# EAGLE board digispark_shield_led_matrix (EAGLE 6.2)
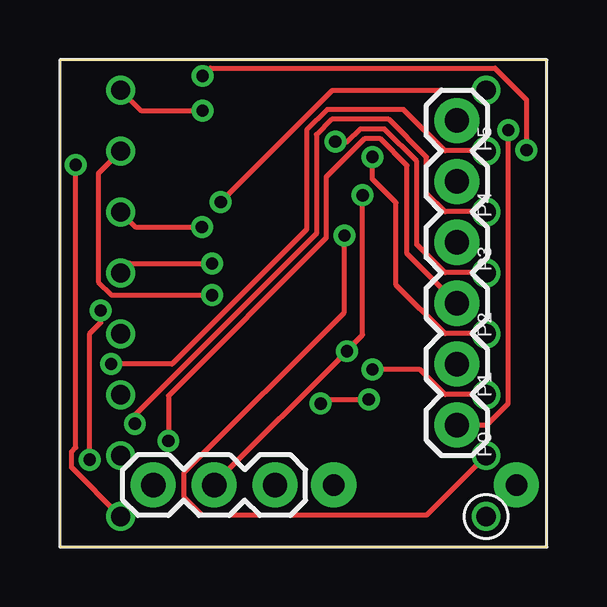
[diagram p0: board, top side]
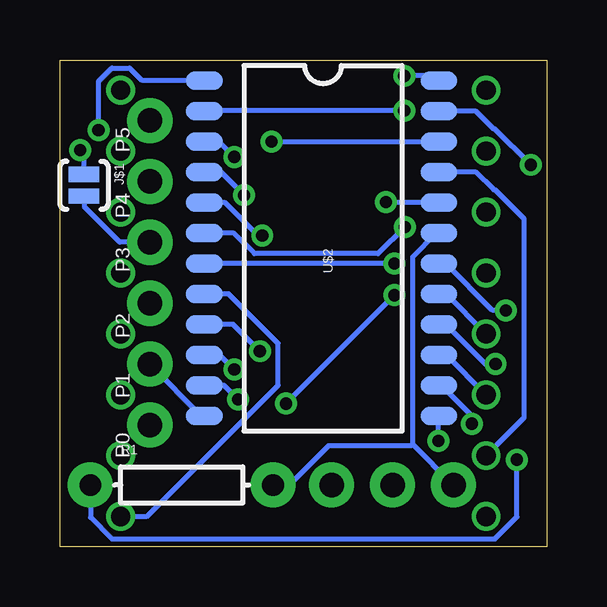
[diagram p1: board, bottom side, seen from below]

Size 20.3 x 20.3 mm. Coordinates in mm from the lower left corner, seen from the top.
Outline: 0,20.3 0,0 20.3,0 20.3,20.3 0,20.3
Copper layers (1*16): Top 0.035mm / dielectric 1.5mm / Bottom 0.035mm
Design rules: minimum track width 8mil, minimum drill 20mil, track to track 8mil, track to pad 8mil, pad to pad 8mil, via to via 8mil, smd to smd 8mil, copper to edge 8mil, drill to drill 8mil, minimum pad ring 8mil, minimum via ring 8mil, stop-mask expansion 4mil, vias tented up to drill 25mil, thermal gap 10mil

## Footprints (pad centres in the part's own frame; a part is rotated, then mirrored left to right if it is on the bottom)
SJ_2S-NO = smd 0.635 x 1.27: 1 -0.45,0; 2 0.45,0
1X03 = drill 1.016 pad 1.88: 1 0,0; 2 2.54,0; 3 5.08,0
1X06 = drill 1.016 pad 1.88: 1 0,0; 2 2.54,0; 3 5.08,0; 4 7.62,0; 5 10.16,0; 6 12.7,0
AXIAL-0.3 = drill 0.9 pad 1.88: P$1 -3.81,0; P$2 3.81,0
LED_8X8_2MM_BL-M07C881 = drill 0.8: +1 1.27,-7.62; +2 3.81,-7.62; +3 6.35,-7.62; +4 8.89,-7.62; +5 -8.89,7.62; +6 -6.35,7.62; +7 -3.81,7.62; +8 -1.27,7.62; -1 -8.89,-7.62; -2 -6.35,-7.62; -3 -3.81,-7.62; -4 -1.27,-7.62; -5 1.27,7.62; -6 3.81,7.62; -7 6.35,7.62; -8 8.89,7.62
SO-24W = smd 0.762 x 1.524: 1 -6.985,-4.953; 2 -5.715,-4.953; 3 -4.445,-4.953; 4 -3.175,-4.953; 5 -1.905,-4.953; 6 -0.635,-4.953; 7 0.635,-4.953; 8 1.905,-4.953; 9 3.175,-4.953; 10 4.445,-4.953; 11 5.715,-4.953; 12 6.985,-4.953; 13 6.985,4.826; 14 5.715,4.826; 15 4.445,4.826; 16 3.175,4.826; 17 1.905,4.826; 18 0.635,4.826; 19 -0.635,4.826; 20 -1.905,4.826; 21 -3.175,4.826; 22 -4.445,4.826; 23 -5.715,4.826; 24 -6.985,4.826

## Placement (x,y rotation side)
J$1  DO  [SJ_2S-NO]  19.3,15.07 270 bottom
JP2  [1X03]  8.97,2.58 180 top
JP3  [1X06]  16.55,5.08 90 top
R1  [AXIAL-0.3]  15.22,2.58 0 bottom
U$1  LED_ARRAY_8X8  [LED_8X8_2MM_BL-M07C881]  10.15,10.15 90 top
U$2  MAX7219  [SO-24W]  9.32,12.45 270 bottom

## Library data of the parts
J$1 JP2 JP3 R1 U$2 = SparkFun
U$1 = sparr

## Nets
GND: JP2.2 U$2.4 U$2.9
N$1: R1.P$1 U$2.18
N$2: JP3.1 U$2.1
N$3: JP3.2 U$2.12
N$4: JP3.3 U$2.13
N$5: U$1.-8 U$2.2
N$6: U$1.-7 U$2.11
N$7: U$1.-6 U$2.6
N$8: U$1.-5 U$2.7
N$9: U$1.-4 U$2.3
N$10: U$1.-3 U$2.10
N$11: U$1.-2 U$2.5
N$12: U$1.-1 U$2.8
N$13: U$1.+8 U$2.17
N$14: U$1.+7 U$2.15
N$15: U$1.+6 U$2.21
N$16: U$1.+5 U$2.23
N$17: U$1.+4 U$2.20
N$18: U$1.+3 U$2.16
N$19: U$1.+2 U$2.14
N$20: U$1.+1 U$2.22
N$21: J$1.1 U$2.24
N$22: J$1.2 JP3.4
VCC: JP2.3 R1.P$2 U$2.19

## Tracks (layer width: path | path; a pad name or v marks a point on that pad's centre or on a via)
GND  (via drill 0.51)
  Top 0.203: JP2.2 6.45,2.59 6.45,2.64 v11.96,8.15 12.01,8.23 12.62,8.84 v12.62,14.66
  Bottom 0.203: v11.96,8.15 13.08,9.27 U$2.9 | v12.62,14.66 13.59,15.62 U$2.4
N$1  (via drill 0.51)
  Top 0.203: v1.7,9.86 1.7,9.35 1.25,8.89 v1.25,3.63
  Bottom 0.203: v1.7,9.86 2.26,9.86 4.22,11.81 U$2.18 | v1.25,3.63 1.25,1.25 2.16,0.33 18.14,0.33 19.02,1.22 19.02,2.56 R1.P$1
N$2  (via drill 0.51)
  Top 0.203: v18.69,17.37 18.69,5.97 17.8,5.08 JP3.1
  Bottom 0.203: v18.69,17.37 18.69,19.41 18.14,19.96 17.4,19.96 16.89,19.46 14.3,19.46 U$2.1
N$3
  Bottom 0.203: U$2.12 14.3,5.49 14.43,5.49 16.54,7.59 JP3.2
N$4  (via drill 0.51)
  Top 0.203: v4.52,4.42 4.52,6.3 11.1,12.88 11.1,15.42 12.7,17.02 13.36,17.02 14.48,15.9 14.48,12.22 16.54,10.16 JP3.3
  Bottom 0.203: v4.52,4.42 4.52,5.46 U$2.13
N$5  (via drill 0.51)
  Top 0.203: v5.94,18.19 3.38,18.19 2.54,19.02 U$1.-8
  Bottom 0.203: v5.94,18.19 14.28,18.19 U$2.2
N$6  (via drill 0.51)
  Top 0.203: v12.88,6.15 11.05,6.15 v10.87,5.97 | v6.35,10.49 2.16,10.49 1.6,11.05 1.6,15.57 U$1.-7
  Bottom 0.203: v12.88,6.15 13.46,6.73 U$2.11 | v6.35,10.49 v10.87,5.97
N$7  (via drill 0.51)
  Top 0.203: v5.92,13.34 3.15,13.34 2.54,13.95 U$1.-6
  Bottom 0.203: v5.92,13.34 7.04,12.22 12.19,12.22 13.06,13.08 U$2.6
N$8  (via drill 0.51)
  Top 0.203: v6.35,11.81 2.92,11.81 U$1.-5
  Bottom 0.203: v6.35,11.81 U$2.7
N$9  (via drill 0.51)
  Top 0.203: v13.03,16.26 13.03,15.34 14.02,14.35 14.02,10.92 16.05,8.89 17.75,8.89 U$1.-4
  Bottom 0.203: v13.03,16.26 13.66,16.89 U$2.3
N$10  (via drill 0.51)
  Top 0.203: v13.03,7.39 15.01,7.39 16.05,6.35 17.75,6.35 U$1.-3
  Bottom 0.203: v13.03,7.39 13.64,8 U$2.10
N$11  (via drill 0.51)
  Top 0.203: v11.86,12.98 11.86,9.78 5.18,3.1 5.18,2.06 5.92,1.32 15.29,1.32 U$1.-2
  Bottom 0.203: v11.86,12.98 12.04,12.98 13.41,14.35 U$2.5
N$12
  Bottom 0.203: U$2.8 13.26,10.54 11.2,8.48 11.2,6.73 16.66,1.27 17.75,1.27 U$1.-1
N$13
  Bottom 0.203: U$1.+8 4.19,10.54 U$2.17
N$14
  Bottom 0.203: U$1.+7 4.19,8 U$2.15
N$15
  Bottom 0.203: U$2.21 2.95,15.62 2.21,14.88 2.16,14.88 0.94,13.66 0.94,5.38 2.52,3.81 U$1.+6
N$16  (via drill 0.51)
  Top 0.203: v0.66,15.93 0.66,4.14 0.48,3.96 0.48,3.3 2.52,1.27 U$1.+5
  Bottom 0.203: v0.66,15.93 2.16,17.42 2.21,17.42 2.95,18.16 U$2.23
N$17  (via drill 0.51)
  Top 0.203: v6.71,14.38 11.35,19.02 17.75,19.02 U$1.+4
  Bottom 0.203: v6.71,14.38 4.52,14.38 U$2.20
N$18  (via drill 0.51)
  Top 0.203: v2.13,7.62 4.67,7.62 10.29,13.23 10.29,17.37 11.15,18.24 14.33,18.24 16.05,16.51 17.75,16.51 U$1.+3
  Bottom 0.203: v2.13,7.62 2.56,7.62 4.22,9.27 U$2.16
N$19  (via drill 0.51)
  Top 0.203: v3.12,5.13 3.12,5.49 10.69,13.06 10.69,17.2 11.33,17.83 13.72,17.83 15.29,16.26 15.29,14.73 16.05,13.97 17.75,13.97 U$1.+2
  Bottom 0.203: v3.12,5.13 3.12,5.46 4.39,6.73 U$2.14
N$20  (via drill 0.51)
  Top 0.203: v11.48,16.89 11.99,16.89 12.52,17.42 13.54,17.42 14.88,16.08 14.88,12.6 16.05,11.43 17.75,11.43 U$1.+1
  Bottom 0.203: v11.48,16.89 4.52,16.89 U$2.22
N$21  (via drill 0.51)
  Top 0.203: v19.46,16.54 19.46,18.64 18.14,19.96 6.27,19.96 v5.94,19.63
  Bottom 0.203: v19.46,16.54 19.3,16.38 19.3,15.54 J$1.1 | v5.94,19.63 4.7,19.63 4.52,19.46 U$2.24
N$22
  Bottom 0.203: J$1.2 19.28,14.61 19.28,14.17 17.8,12.7 JP3.4
VCC
  Bottom 0.203: 5.59,4.27 5.59,12.09 4.6,13.08 4.52,13.08 U$2.19 | 5.59,4.27 3.91,2.59 JP2.3 | R1.P$2 11.4,2.59 10.72,2.59 9.09,4.22 5.66,4.22 5.59,4.27

## Text on the board
tNames: P5 | P4 | P3 | P2 | P1 | P0
bNames: P5 | P4 | P3 | P2 | P1 | P0
bValues: (C) Sparr 20120824 CC-BY-SA | Digispark LED Matrix Shield